# Altium PCB PCB1.PcbDoc
Units mil, origin at the board's own origin, x right, y up, seen from the top; angles counter-clockwise.
Board outline 4140 x 3705 mil, 2 copper layers (Top Layer, Bottom Layer); 60 components, 64 nets, 239 pads, 0 vias.
Unrouted connection lines stored in the file: 91.
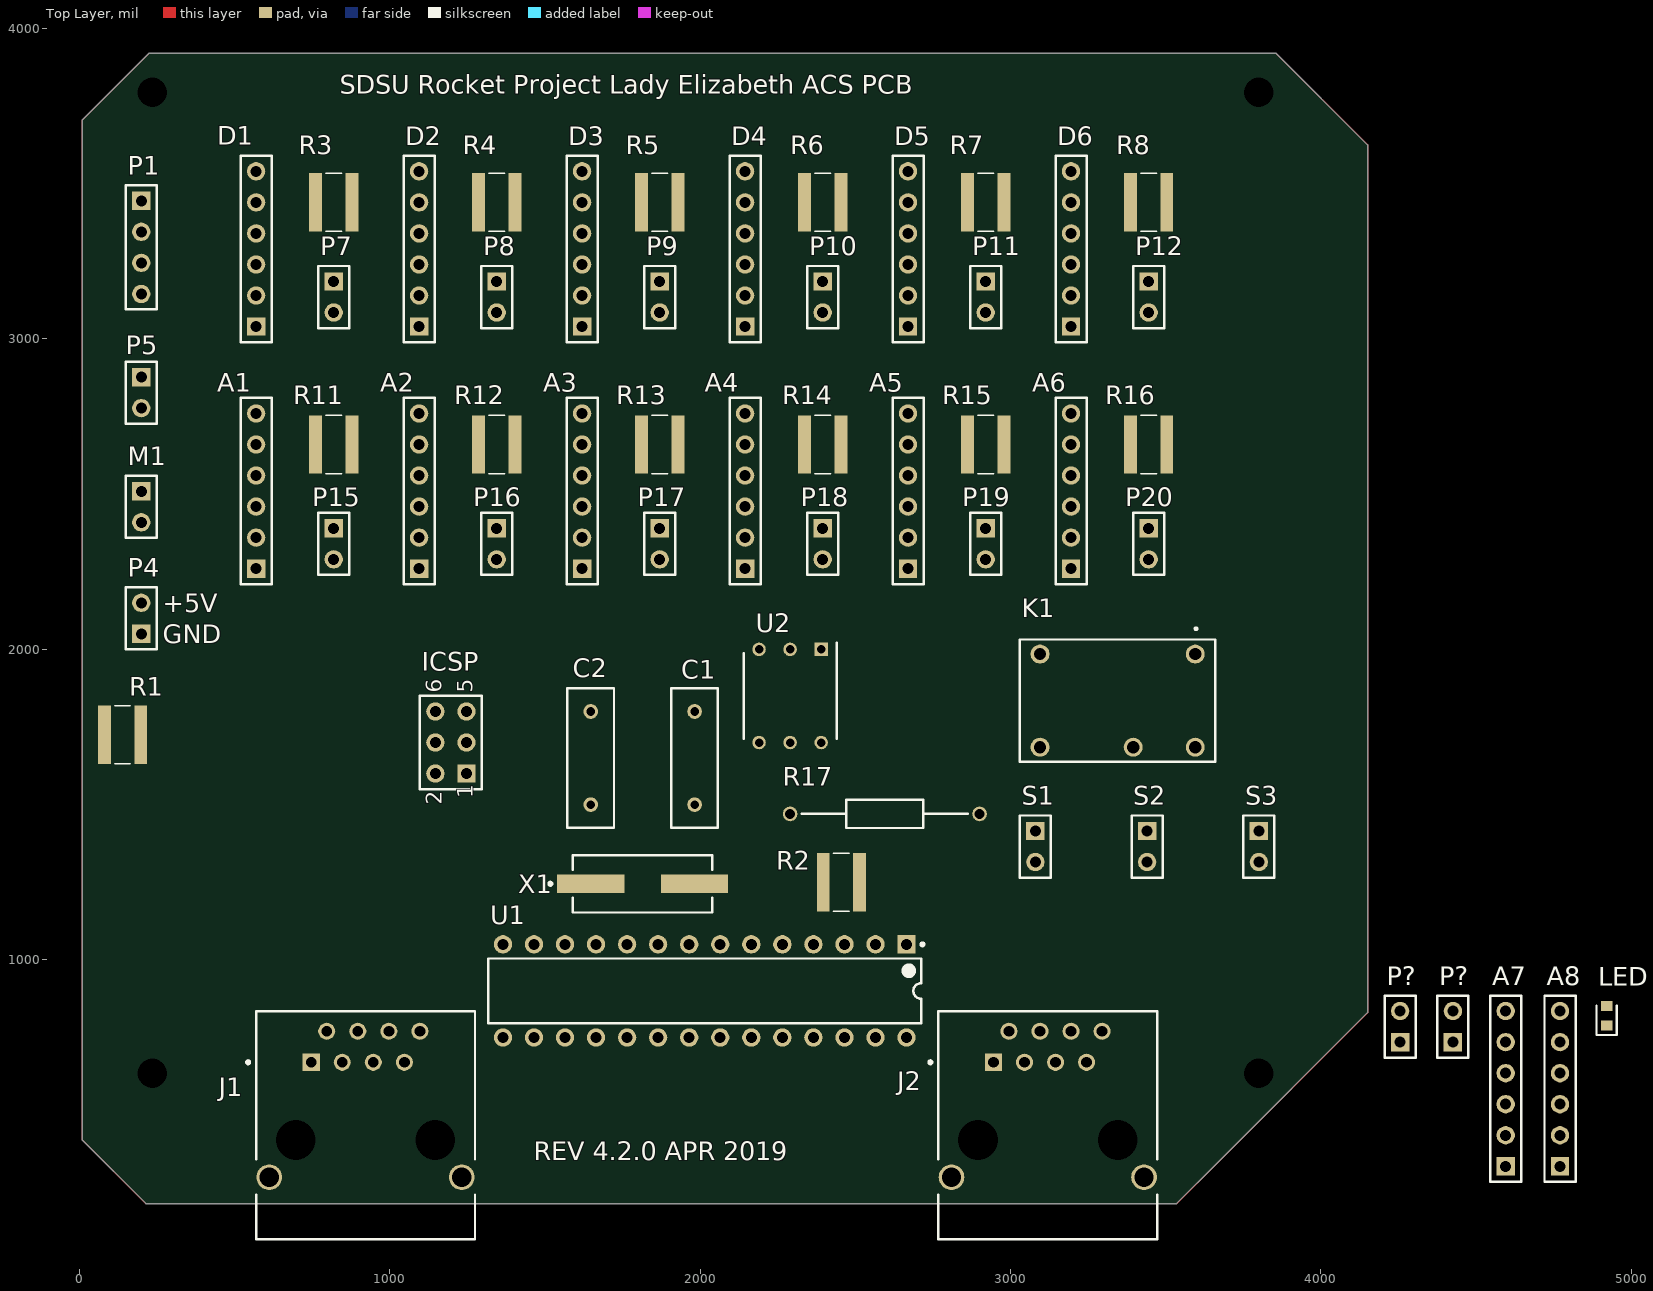
[diagram p0: Top Layer view]
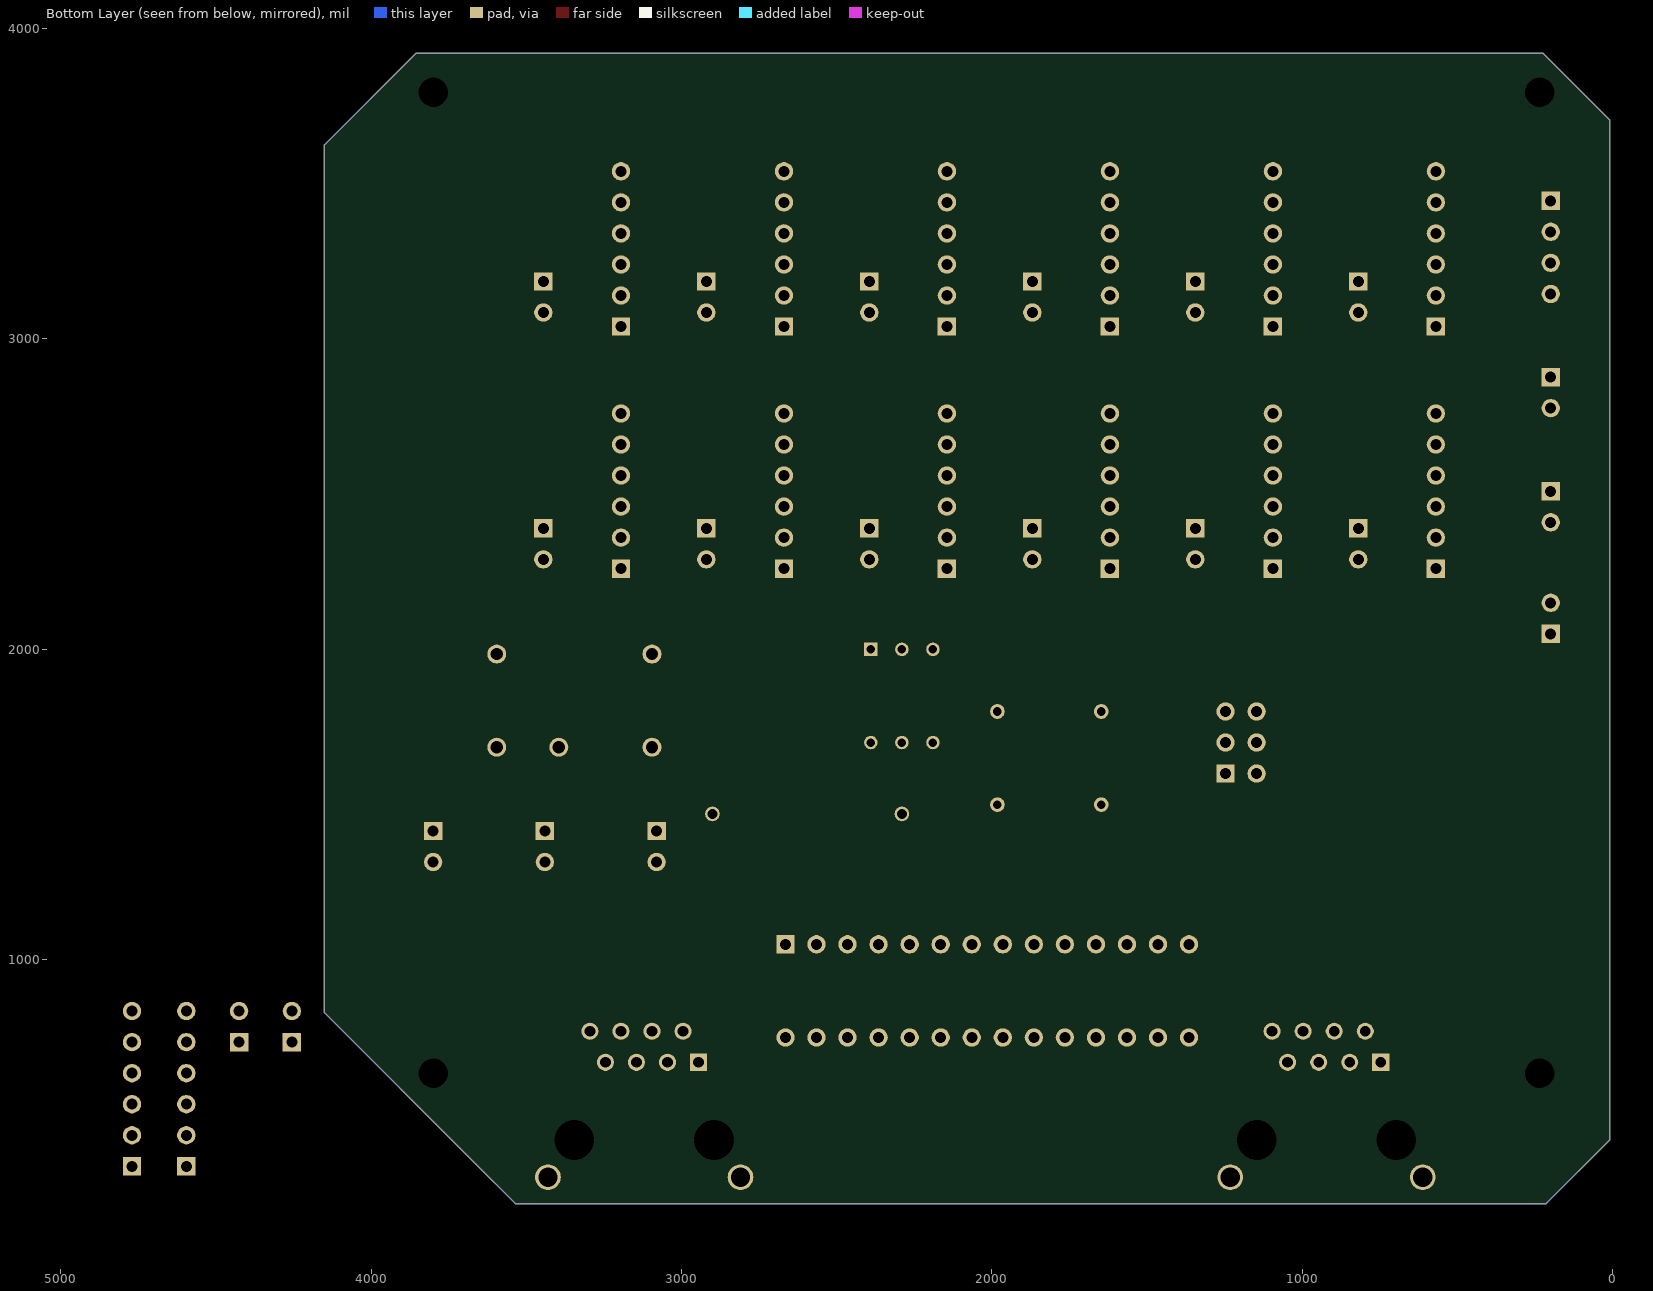
[diagram p1: Bottom Layer view, seen from below]

## Layer stack, top to bottom
Top Solder: solder mask 0.4, Solder Resist, Dk 3.5
Top Layer: signal copper 1.4
Dielectric 1: dielectric 12.6, FR-4, Dk 4.8
Bottom Layer: signal copper 1.4
Bottom Solder: solder mask 0.4, Solder Resist, Dk 3.5

## Board outline
215,215 10,420 10,3705 225,3920 3855,3920 4150,3625 4150,830 3665,345 3535,215

## Design rules (kind name [scope] priority, off if disabled: settings)
Clearance [All] p1: gap=10 ignorepadtopadclearanceinfootprint=FALSE except(0: Arc-Hole Track-Hole SMDPad-Hole THPad-Hole Via-Hole Fill-Hole Poly-Hole Region-Hole Text-Hole)
PolygonConnect [All] p1: connectstyle=Relief reliefconductorwidth=10 reliefentries=4 polygonreliefangle="90 Angle" airgapwidth=10
RoutingVias [All] p1: holewidth=28 width=50 viastyle="Through Hole" minholewidth=28 minwidth=50 maxholewidth=28 maxwidth=50
SolderMaskExpansion [All] p1: expansion=4
Width VCC_Width [InNet('VCC')] p1: maxlimit=20 minlimit=20 preferedwidth=20 minimp=50.000000 maximp=50.000000 favimp=50.000000
Width VCC_Width2 [InNet('NetM1_1')] p2: maxlimit=20 minlimit=20 preferedwidth=20 minimp=50.000000 maximp=50.000000 favimp=50.000000
Width [All] p3: maxlimit=10 minlimit=10 preferedwidth=10
30 further rules are at their usual default settings.

## Components (designator, comment, footprint, x,y, rotation, side; value= is the part's Value field where it differs from the comment)
A1 "ANALOG1" HDR1X6 570,2260 r90 top
A2 "ANALOG2" HDR1X6 1095,2260 r90 top
A3 "ANALOG3" HDR1X6 1620,2260 r90 top
A4 "ANALOG4" HDR1X6 2145,2260 r90 top
A5 "ANALOG5" HDR1X6 2670,2260 r90 top
A6 "ANALOG6" HDR1X6 3195,2260 r90 top
A7 "ANALOG7" HDR1X6 4595,335 r90 top
A8 "ANALOG8" HDR1X6 4770,335 r90 top
C1 "Cap" RAD-0.3 1982.32,1650 r90 top value=22pF
C2 "Cap" RAD-0.3 1647.68,1650 r90 top value=22pF
D1 "DIGITAL1" HDR1X6 570,3040 r90 top
D2 "DIGITAL2" HDR1X6 1095,3040 r90 top
D3 "DIGITAL3" HDR1X6 1620,3040 r90 top
D4 "DIGITAL4" HDR1X6 2145,3040 r90 top
D5 "DIGITAL5" HDR1X6 2670,3040 r90 top
D6 "IGNITER" HDR1X6 3195,3040 r90 top
ICSP "ICSP" HDR2X3 1247.4,1600 r90 top
J1 "ETH0" TECO-5555153-1_V 922.4,420 r0 top
J2 "ETH1" TECO-5555153-1_V 3120,420 r0 top
K1 "G6E-134P-ST-US-DC6" G6E-134P-US 3659.96,1835 r180 top
LED? "SML-D12U1WT86" LEDC1608X65N 4920,820 r90 top
M1 "MLTM" HDR1X2 200,2509.27 r270 top
P1 "ABT" HDR1X4 200,3445 r270 top
P4 "PWR" HDR1X2 200,2050 r90 top
P5 "ABT LED" HDR1X2 200,2877.14 r270 top
P7 "D1_LED" HDR1X2 820,3185 r270 top
P8 "D2_LED" HDR1X2 1345,3185 r270 top
P9 "D3_LED" HDR1X2 1870,3185 r270 top
P10 "D4_LED" HDR1X2 2395,3185 r270 top
P11 "D5_LED" HDR1X2 2920,3185 r270 top
P12 "D6_LED" HDR1X2 3445,3185 r270 top
P15 "LOX VNT LED" HDR1X2 820,2390 r270 top
P16 "LOX VNT LED" HDR1X2 1345,2390 r270 top
P17 "LOX VNT LED" HDR1X2 1870,2390 r270 top
P18 "LOX VNT LED" HDR1X2 2395,2390 r270 top
P19 "LOX VNT LED" HDR1X2 2920,2390 r270 top
P20 "LOX VNT LED" HDR1X2 3445,2390 r270 top
P? "LOX VNT LED" HDR1X2 4425,735 r90 top
P? "LOX VNT LED" HDR1X2 4255,735 r90 top
R1 "Res3" RESC3146X60N 140,1725 r0 top value=220
R2 "Res3" RESC3146X60N 2455,1250 r0 top value=10K
R3 "Res3" RESC3146X60N 820,3440 r180 top value=220
R4 "Res3" RESC3146X60N 1345,3440 r180 top value=220
R5 "Res3" RESC3146X60N 1870,3440 r180 top value=220
R6 "Res3" RESC3146X60N 2395,3440 r180 top value=220
R7 "Res3" RESC3146X60N 2920,3440 r180 top value=220
R8 "Res3" RESC3146X60N 3445,3440 r180 top value=220
R11 "Res3" RESC3146X60N 820,2660 r180 top value=220
R12 "Res3" RESC3146X60N 1345,2660 r180 top value=220
R13 "Res3" RESC3146X60N 1870,2660 r180 top value=220
R14 "Res3" RESC3146X60N 2395,2660 r180 top value=220
R15 "Res3" RESC3146X60N 2920,2660 r180 top value=220
R16 "Res3" RESC3146X60N 3445,2660 r180 top value=220
R17 "1M" RESAD1550W60L630D230 2900.24,1470 r180 top
S1 "IGN SFT" HDR1X2 3080,1415 r270 top
S2 "PRESS SFT" HDR1X2 3440,1415 r270 top
S3 "LNCH SFT" HDR1X2 3800,1415 r270 top
U1 "ATmega328P-PU" 28P3 2015,900 r270 top
U2 "4N35" DIP762W50P254L712H450Q6N 2290,1850 r270 top
X1 "16MHz Clock" CFM-HCM49-2_V 1815,1245 r0 top

## Footprints (in the part's own frame and the unit in brackets; to place one, negate y for a bottom-side part, rotate by r counter-clockwise, add the part's x,y. Pads: shape width x height; smd on the part's side, far side on the other; paste and mask are expansions set on the pad)
28P3 [mm] "28-Pin Plastic Dual In-Line Package (PDIP)"
  rect 1.5x1.5 hole 0.9: 1(-3.81,16.51)
  round 1.5 hole 0.9: 2(-3.81,13.97) 3(-3.81,11.43) 4(-3.81,8.89) 5(-3.81,6.35) 6(-3.81,3.81) 7(-3.81,1.27) 8(-3.81,-1.27) 9(-3.81,-3.81) 10(-3.81,-6.35) 11(-3.81,-8.89) 12(-3.81,-11.43) 13(-3.81,-13.97) 14(-3.81,-16.51) 15(3.81,-16.51) 16(3.81,-13.97) 17(3.81,-11.43) 18(3.81,-8.89) 19(3.81,-6.35) 20(3.81,-3.81) 21(3.81,-1.27) 22(3.81,1.27) 23(3.81,3.81) 24(3.81,6.35) 25(3.81,8.89) 26(3.81,11.43) 27(3.81,13.97) 28(3.81,16.51)
  silkscreen extent -3.93,-17.7 2.65,17.94, body extent -3.6,-17.65 3.6,17.65, height 4.58
CFM-HCM49-2_V [mm] "SMD, 2-Leads, Body 11.4x4.7mm, Pitch 8.5mm"
  rect 5.5x1.5 smd: 1(-4.25,0) 2(4.25,0)
  silkscreen extent -7.67,-2.35 5.7,2.35, body extent -5.7,-2.35 5.7,2.35, height 4.3
DIP762W50P254L712H450Q6N [mm]
  rect 1.1x1.1 hole 0.7: 1(-3.81,2.54)
  round 1.1 hole 0.7: 2(-3.81,0) 3(-3.81,-2.54) 4(3.81,-2.54) 5(3.81,0) 6(3.81,2.54)
  silkscreen extent -4.36,-3.81 3.5,3.81, body extent -3.94,-3.56 3.94,3.56, height 4.5
G6E-134P-US [mm]
  round 1.55 hole 1: 1(1.65,-3.81) 6(14.35,-3.81) 7(14.35,3.81) 10(6.73,3.81) 12(1.65,3.81)
  silkscreen extent 0,-5.97 16,5
HDR1X2 [mm] "Connector; Header; 2 Position"
  rect 1.5x1.5 hole 0.9: 1(0,0)
  round 1.5 hole 0.9: 2(2.54,0)
  silkscreen extent -1.27,-1.27 3.81,1.27
HDR1X4 [mm] "Connector; Header; 4 Position"
  rect 1.5x1.5 hole 0.9: 1(0,0)
  round 1.5 hole 0.9: 2(2.54,0) 3(5.08,0) 4(7.62,0)
  silkscreen extent -1.27,-1.27 8.89,1.27
HDR1X6 [mm] "Connector; Header; 6 Position"
  rect 1.5x1.5 hole 0.9: 1(0,0)
  round 1.5 hole 0.9: 2(2.54,0) 3(5.08,0) 4(7.62,0) 5(10.16,0) 6(12.7,0)
  silkscreen extent -1.27,-1.27 13.97,1.27
HDR2X3 [mm] "Connector; Header; 3x2 Position"
  rect 1.5x1.5 hole 0.9: 1(0,0)
  round 1.5 hole 0.9: 2(0,2.54) 3(2.54,0) 4(2.54,2.54) 5(5.08,0) 6(5.08,2.54)
  silkscreen extent -1.27,-1.27 6.35,3.81
LEDC1608X65N [mm]
  rect 0.85x0.95 smd: 1(-0.8,0) 2(0.8,0)
  silkscreen extent -1.58,-0.82 0.8,0.82
RAD-0.3 [mm] "Radial Cap, Thru-Hole; 2 Leads; 0.3 in Pin Spacing"
  round 1.2 hole 0.7: 1(-3.81,0) 2(3.81,0)
  silkscreen extent -5.71,-1.91 5.71,1.91
RESAD1550W60L630D230 [mm]
  round 1.2 hole 0.8: 1(0,0) 2(15.5,0)
  silkscreen extent 0.95,-1.15 14.55,1.15, body extent -0.3,-1.25 15.8,1.25, height 2.49
RESC3146X60N [mm]
  rect 1.05x4.77 smd: 1(-1.485,0) 2(1.485,0)
  silkscreen extent -0.64,-2.38 0.64,2.38
TECO-5555153-1_V [mm] "RJ45, 8-Leads, Body 18.67x17.91mm, Pitch 1.27mm"
  rect 1.4x1.4 hole 0.89: 1(-4.445,6.35)
  round 1.4 hole 0.89: 2(-3.175,8.89) 3(-1.905,6.35) 4(-0.635,8.89) 5(0.635,6.35) 6(1.905,8.89) 7(3.175,6.35) 8(4.445,8.89)
  round 2.95 hole 3.25 unplated: MH1(-5.715,0) MH2(5.715,0)
  round 2.1 hole 1.57: S1(-7.875,-3.05) S2(7.875,-3.05)
  silkscreen extent -9.73,-8.13 8.96,10.54, body extent -8.89,-8.13 8.89,10.54, height 13.2

## Part data
A1 A2 A3 A4 A5 A6 A7 A8 D1 D2 D3 D4 D5 D6: library part "Header 6", "Header, 6-Pin", LatestRevisionDate=17-Jul-2002, LatestRevisionNote="Re-released for DXP Platform.", Publisher="Altium Limited"
C1 C2: "Capacitor", LatestRevisionDate=17-Jul-2002, LatestRevisionNote="Re-released for DXP Platform.", PackageDescription="Radial Cap, Thru-Hole; 2 Leads; 0.3 in Pin Spacing", PackageReference=RAD-0.3, Published=8-Jun-2000, Publisher="Altium Limited"
ICSP: library part "Header 3X2", "Header, 3-Pin, Dual row", LatestRevisionDate=17-Jul-2002, LatestRevisionNote="Re-released for DXP Platform.", Publisher="Altium Limited"
J1 J2: library part CMP-2000-05640-1, "RJ45 Connector, Pitch 1.27 mm, 8 Position, Height 13.08 mm, Tail Length 3.81 mm, -40 to 85 degC, RoHS, Tray", LED Color=DoesNotContainLED, Manufacturer="TE Connectivity", Operating Temperature=-40°C~85°C, Package Description="RJ45 Connector, Pitch 1.27 mm, 8 Position, Height 13.08 mm, Tail Length 3.81 mm", Package Reference=5555153-1, Ratings=Cat3, Standard Package=136, 3D Model=5555153-1.pdf, Catalog Drawings="JackSideEntryRightAngle /  / JackSideEntryRightAngleTop", Category=Connectors,Interconnects, Connector Type=Jack, Contact Finish=Gold, Contact Finish Thickness=50µin(1.27µm), Contact Material=PhosphorBronze, Datasheet URL=http://www.te.com/commerce/DocumentDelivery/DDEController?Action=srchrtrv&DocNm=5555153&DocType=Customer+Drawing&DocLang=English&DocFormat=pdf&PartCntxt=5555153-1, Datasheet Version="Rev. D2, 05/2016", Dynamic Catalog=ModularJacks, Family=ModularConnectors-Jacks, Features=BoardLock,PanelStops, Housing Material=PolybutyleneTerephthalate(PBT),Polyester, Manufacturer URL=http://www.te.com/, Mounting Technology=ThroughHole, Mounting Type=ThroughHole, Number of Ports=1, Number of Positions/Contacts=8p8c(RJ45,Ethernet), Number of Rows=1, Orientation=90°Angle(Right), Other Names=A31438, Packaging=Tray, RoHS Information=5555153-1StatementofCompliance, Shielding=Shielded, Tab Direction=Down, Termination=Solder
K1: "Relay or Contactor", Manufacturer_Name="Omron Electronics", Mouser Part Number=653-G6E134PSTUSDC6, Allied_Number=70381892, Allied Price/Stock=https://www.alliedelec.com/omron-electronic-components-g6e-134p-st-us-dc6/70381892/, Datasheet Link=http://omronfs.omron.com/en_US/ecb/products/pdf/en-g6e.pdf, Manufacturer_Part_Number=G6E-134P-ST-US-DC6, Mouser Price/Stock=https://www.mouser.com/Search/Refine.aspx?Keyword=653-G6E134PSTUSDC6
LED?: "LED", Manufacturer_Name="ROHM Semiconductor", Mouser Part Number=755-SML-D12U1WT86, RS Part Number=1332870, Datasheet Link=https://componentsearchengine.com/Datasheets/1/SML-D12U1WT86.pdf, Height=0.65mm, Manufacturer_Part_Number=SML-D12U1WT86, Mouser Price/Stock=https://www.mouser.com/Search/Refine.aspx?Keyword=755-SML-D12U1WT86, RS Price/Stock=http://uk.rs-online.com/web/p/products/1332870
M1 P4 P5 P7 P8 P9 P10 P11 P12 P15 P16 P17 P18 P19 P20 P? P? S1 S2 S3: library part "Header 2", "Header, 2-Pin", LatestRevisionDate=17-Jul-2002, LatestRevisionNote="Re-released for DXP Platform.", Publisher="Altium Limited"
P1: library part "Header 4", "Header, 4-Pin", LatestRevisionDate=17-Jul-2002, LatestRevisionNote="Re-released for DXP Platform.", Publisher="Altium Limited"
R1 R2 R3 R4 R5 R6 R7 R8 R11 R12 R13 R14 R15 R16: "Resistor", LatestRevisionDate=29-May-2009, LatestRevisionNote="IPC-7351 Footprint Added.", PackageDescription="Chip Resistor", PackageReference=J1-0603, Published=8-Jun-2000, Publisher="Altium Limited"
R17: library part YR1B1M0CC, "Resistor", Manufacturer_Name="TE Connectivity", Mouser Part Number=279-YR1B1M0CC, RS Part Number=1649061, Allied_Number=70300029, Allied Price/Stock=https://www.alliedelec.com/te-connectivity-yr1b1m0cc/70300029/, Datasheet Link=http://www.te.com/commerce/DocumentDelivery/DDEController?Action=showdoc&DocId=Data+Sheet%7F1773265%7FA%7Fpdf%7FEnglish%7FENG_DS_1773265_A.pdf%7F2-1676913-7, Manufacturer_Part_Number=YR1B1M0CC, Mouser Price/Stock=https://www.mouser.com/Search/Refine.aspx?Keyword=279-YR1B1M0CC, RS Price/Stock=http://uk.rs-online.com/web/p/products/1649061
U1: library part CMP-0095-00013-2, "8-bit AVR Microcontroller, 32KB Flash, 1KB EEPROM, 2KB SRAM, 28-pin PDIP, Industrial Grade (-40°C to 85°C)", ComponentLink1Description="Manufacturer URL", ComponentLink1URL=http://www.atmel.com/, ComponentLink2Description="ATmega48A/48PA/88A/88PA/168A/168PA/328/328P Datasheet", ComponentLink2URL=http://www.atmel.com/dyn/resources/prod_documents/8271.pdf, ComponentLink3Description="ATmega48A/48PA/88A/88PA/168A/168PA/328/328P Summary", ComponentLink3URL=http://www.atmel.com/dyn/resources/prod_documents/8271S.pdf, DatasheetVersion="revD, May-2011", PackageReference=28P3, PackageVersion="revB, Sep-2001", RevisionNote="DatasheetVersion updated. URLs added."
U2: "Transistor", Manufacturer_Name=Isocom, RS Part Number=1712954, Datasheet Link=http://uk.rs-online.com/web/p/products/597302, Height=4.5mm, Manufacturer_Part_Number=4N35, RS Price/Stock=http://uk.rs-online.com/web/p/products/1712954
X1: library part CMP-1215-00001-1, "At-Cut Crystal Unit, 3.5 to 30 MHz, -40 to 85 degC, 2-Pin 11.4×4.7×4.3 mm SMD, RoHS, Reel", Manufacturer="Citizen Finetech Miyota", Operating Temperature="-40 to 85 degC", PartNumber=HCM49-8.000MABJ-UT, C0="7 pF Max.", ComponentLink1Description="Manufacturer URL", ComponentLink1URL=http://cfm.citizen.co.jp/english/index.html, ComponentLink2Description=Datasheet, ComponentLink2URL=http://cfm.citizen.co.jp/english/product/pdf/HCM49.pdf, ComponentLink3Description="Package Specification", ComponentLink3URL=http://cfm.citizen.co.jp/english/product/pdf/HCM49.pdf, DatasheetVersion=Jan-12, DL="100 uW", f0="3.5 to 30 MHz", IR="500 MOhm Min.", Mounting Technology="Surface Mount", PackageDescription="2-Pin Surface Mount, Body 11.4 x 4.7 mm, Pitch 8.5 mm", Packing=Reel, R1="50 to 200 Ohm", RoHS=TRUE

## Free pads (board coordinates)
  round 60 hole 94.49: 2(235,3795) 3(3800,3795) 4(235,635) 5(3800,635)

## Nets (pads, with @x,y where several pads share a name; then routed paths per layer and width w, separated by ;. In a path a pad name is that pad's centre, name@x,y a point inside that pad or via, vN(x,y) a via of type N, cw(c..) or ccw(c..) an arc to the next point about the centre after c; other vN are vias at no path point)
A1: A1.2 J1.1
A2: A2.2 J1.2
A3: A3.2 J1.3
A4: A4.2 J1.4
A5: A5.2 J1.5
A6: A6.2 J1.6
A7: A7.2 J1.7
A8: A8.2 J1.8
GND: C1.2 C2.2 D1.3 D2.3 D3.3 D4.3 D5.3 D6.3 ICSP.6 K1.6 K1.12 M1.2 P4.1 P5.2 P7.2 P8.2 P9.2 P10.2 P11.2 P12.2 P15.2 P16.2 P17.2 P18.2 P19.2 P20.2 P?.2 R17.2 U1.8 U2.2
"IGN SFT": J2.1 S1.2
IGN_OUT: U2.4
"LNCH SFT": J2.3 S3.2
NetA1_5: A1.5 R11.2
NetA2_5: A2.5 R12.2
NetA3_5: A3.5 R13.2
NetA4_5: A4.5 R14.2
NetA5_5: A5.5 R15.2
NetA6_5: A6.5 R16.2
NetA7_5: A7.5
NetA8_5: A8.5
NetC1_1: C1.1 U1.9 X1.2
NetC2_1: C2.1 U1.10 X1.1
NetD1_5: D1.5 R3.2
NetD2_5: D2.5 R4.2
NetD3_5: D3.5 R5.2
NetD4_5: D4.5 R6.2
NetD5_5: D5.5 R7.2
NetD6_5: D6.5 R8.2
NetLED?_2: LED?.2
NetM1_1: M1.1 P1.1 P1.3 P4.2
NetP1_4: P1.4 R1.2
NetP5_1: P5.1 R1.1
NetP7_1: P7.1 R3.1
NetP8_1: P8.1 R4.1
NetP9_1: P9.1 R5.1
NetP10_1: P10.1 R6.1
NetP11_1: P11.1 R7.1
NetP12_1: P12.1 R8.1
NetP15_1: P15.1 R11.1
NetP16_1: P16.1 R12.1
NetP17_1: P17.1 R13.1
NetP18_1: P18.1 R14.1
NetP19_1: P19.1 R15.1
NetP20_1: P20.1 R16.1
NetP?_1: P?.1@4255,735
NetR17_1: R17.1 U2.6
PB0: J2.4 U1.14
PB1: J2.5 U1.15
PB2: J2.6 U1.16
PB3: ICSP.4 J2.7 U1.17
PB4: ICSP.1 U1.18 U2.1
PB5: ICSP.3 U1.19
PD0: U1.2
PD1: U1.3
PD2: D1.2 U1.4
PD3: D2.2 U1.5
PD4: D3.2 U1.6
PD5: D4.2 U1.11
PD6: D5.2 U1.12
PD7: D6.2 U1.13
"PRESS SFT": J2.2 S2.2
RST: ICSP.5 R2.2 U1.1
SGND: A1.3 A2.3 A3.3 A4.3 A5.3 A6.3 A7.3 A8.3 J2.8 K1.7 S1.1 S2.1 S3.1
VCC: A1.6 A2.6 A3.6 A4.6 A5.6 A6.6 A7.6 A8.6 D1.1 D1.6 D2.1 D2.6 D3.1 D3.6 D4.1 D4.6 D5.1 D5.6 D6.1 D6.6 ICSP.2 K1.1 P1.2 R2.1 U1.7 U2.5
pads on no net: A1.1 A1.4 A2.1 A2.4 A3.1 A3.4 A4.1 A4.4 A5.1 A5.4 A6.1 A6.4 A7.1 A7.4 A8.1 A8.4 D1.4 D2.4 D3.4 D4.4 D5.4 D6.4 J1.MH1 J1.MH2 J1.S1 J1.S2 J2.MH1 J2.MH2 J2.S1 J2.S2 K1.10 LED?.1 P?.1@4425,735 U1.20 U1.21 U1.22 U1.23 U1.24 U1.25 U1.26 U1.27 U1.28 U2.3

## Polygon pours and split planes (outlines as drawn)
SGND on Bottom Layer "Signal Ground Pour" (solid, shelved, pour order 14): 10,3705 225,3920 3855,3920 4150,3625 4150,830 3535,215 215,215 10,420
no net on Bottom Layer "Board Shape" (solid, shelved, pour order 0): 10,3715
GND on Top Layer "Ground Pour" (solid, shelved, pour order 12): 10,3705 225,3920 3855,3920 4150,3625 4150,830 3535,215 215,215 10,420

## Silkscreen, mask and mechanical layers (free items; w line width, h text height)
Top Overlay:
  text "SDSU Rocket Project Lady Elizabeth ACS PCB" at 840,3790 h60
  text "+5V" at 270,2120 h60
  text "GND" at 270,2020 h60
  text "REV 4.2.0 APR 2019" at 1465,355 h60
Mechanical 1:
  lines w10: 10,420 215,215 3535,215 3665,345 4150,830 4150,3625 3855,3920 3355,3920 225,3920 10,3705 10,420

## Text inside footprints (layer, text, board x,y; h text height)
ICSP: Top Overlay "6" at 1167.4,1860 h50 r90; Top Overlay "5" at 1267.4,1860 h50 r90; Top Overlay "2" at 1167.4,1500 h50 r90; Top Overlay "1" at 1267.4,1520 h50 r90